# Altium PCB PCB_Ticketing_Master.PcbDoc
Units mm, origin at the board's own origin, x right, y up, seen from the top; angles counter-clockwise.
Board outline 125.09 x 85.09 mm, 2 copper layers (Top Layer, Bottom Layer); 58 components, 41 nets, 250 pads, 337 vias.
Unrouted connection lines stored in the file: 1.
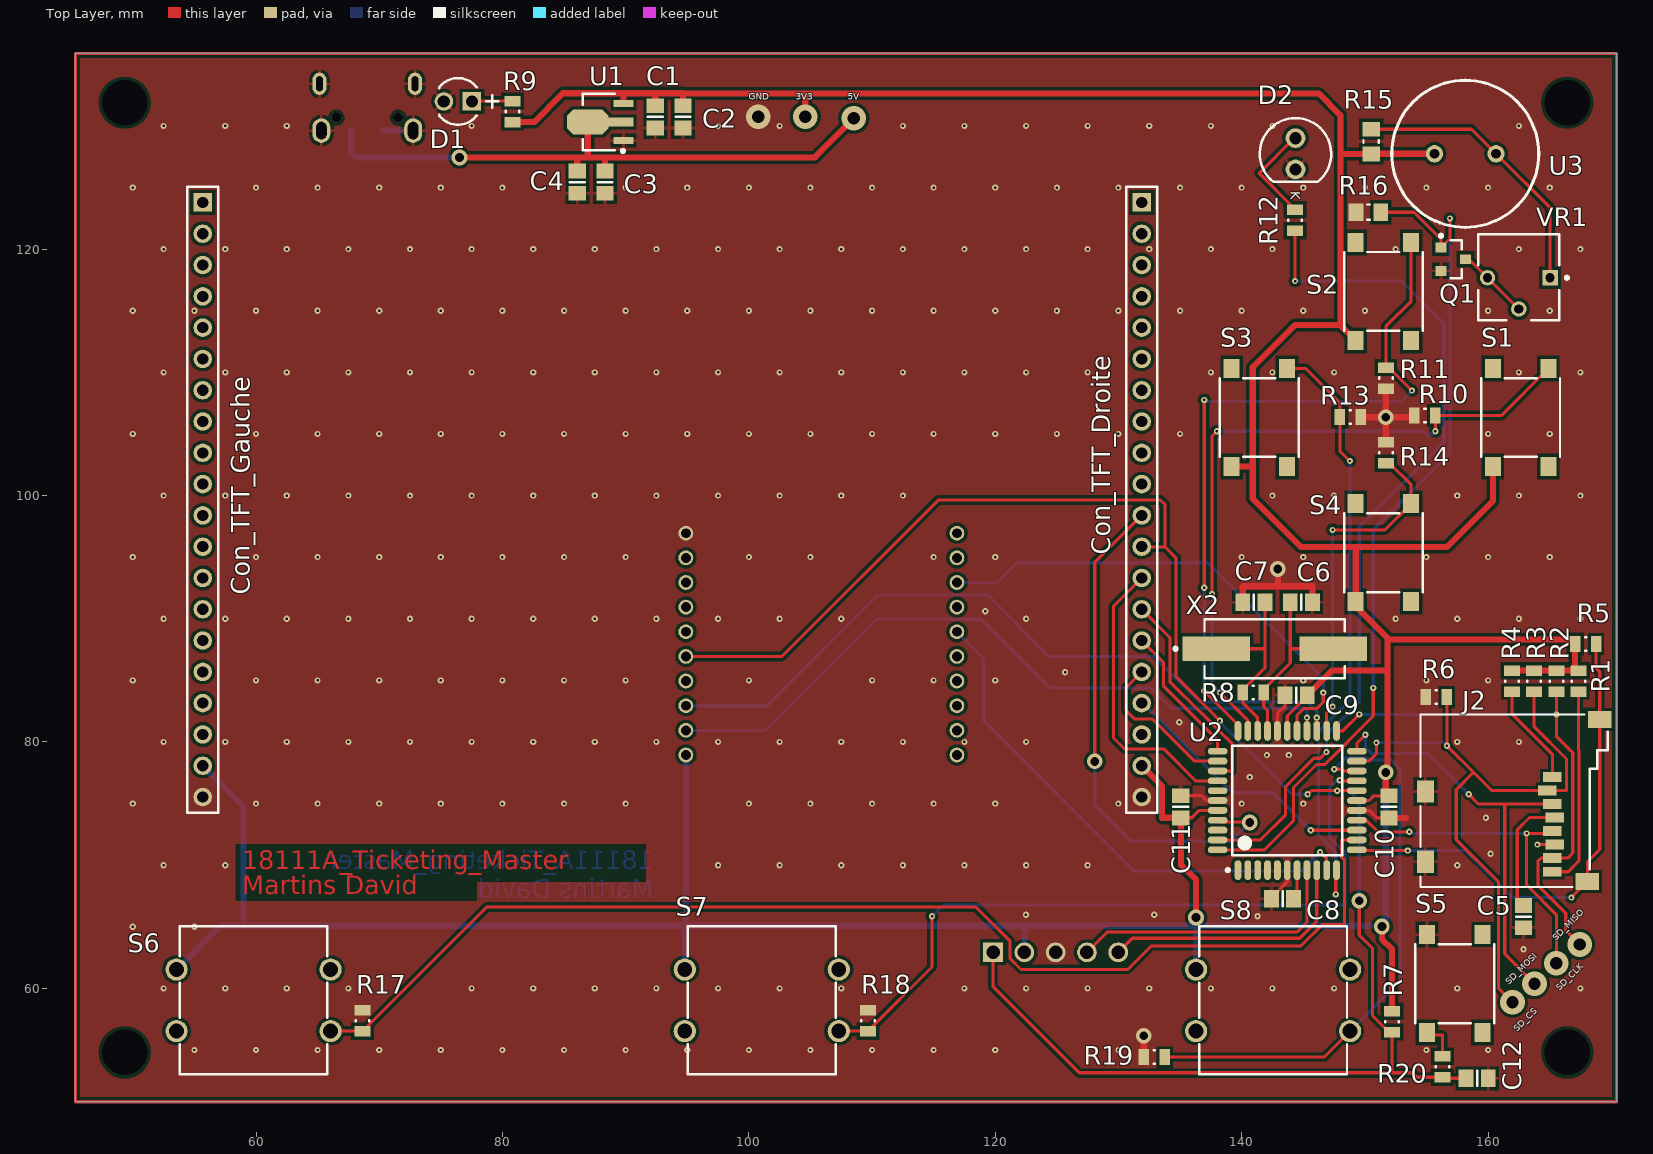
[diagram p0: Top Layer view]
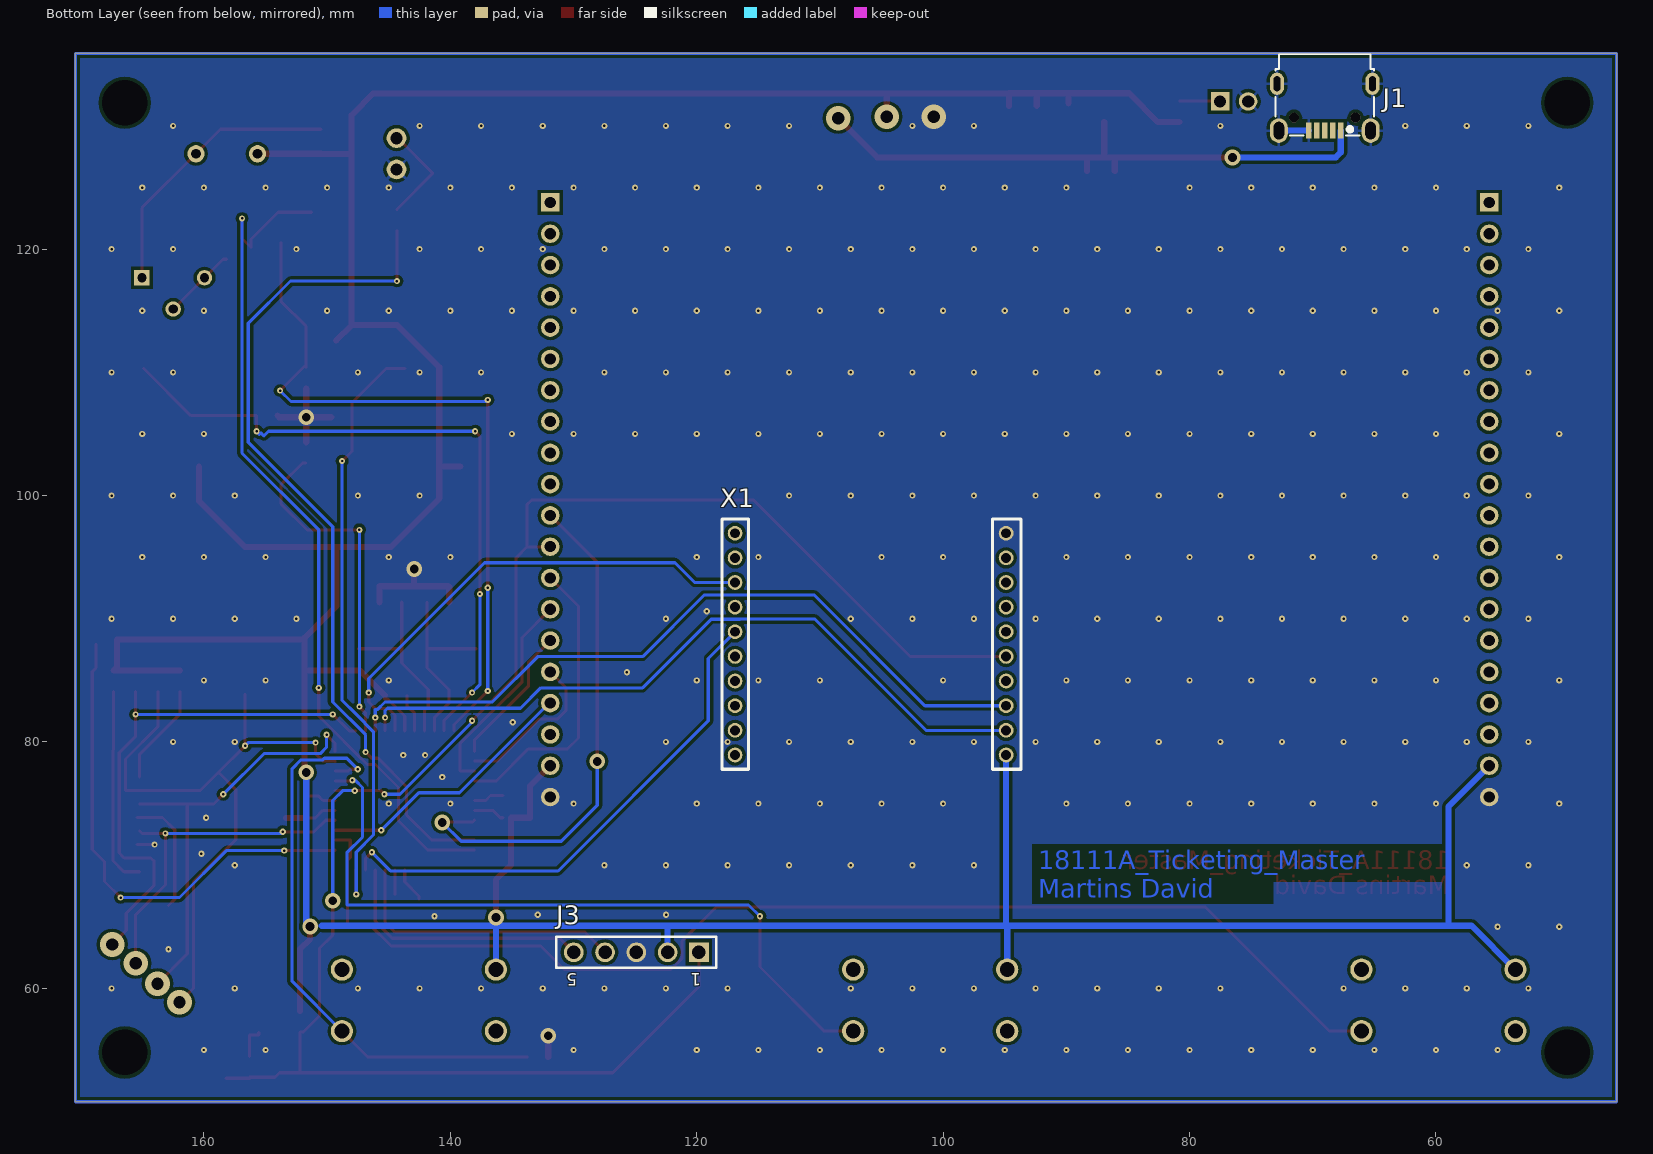
[diagram p1: Bottom Layer view, seen from below]
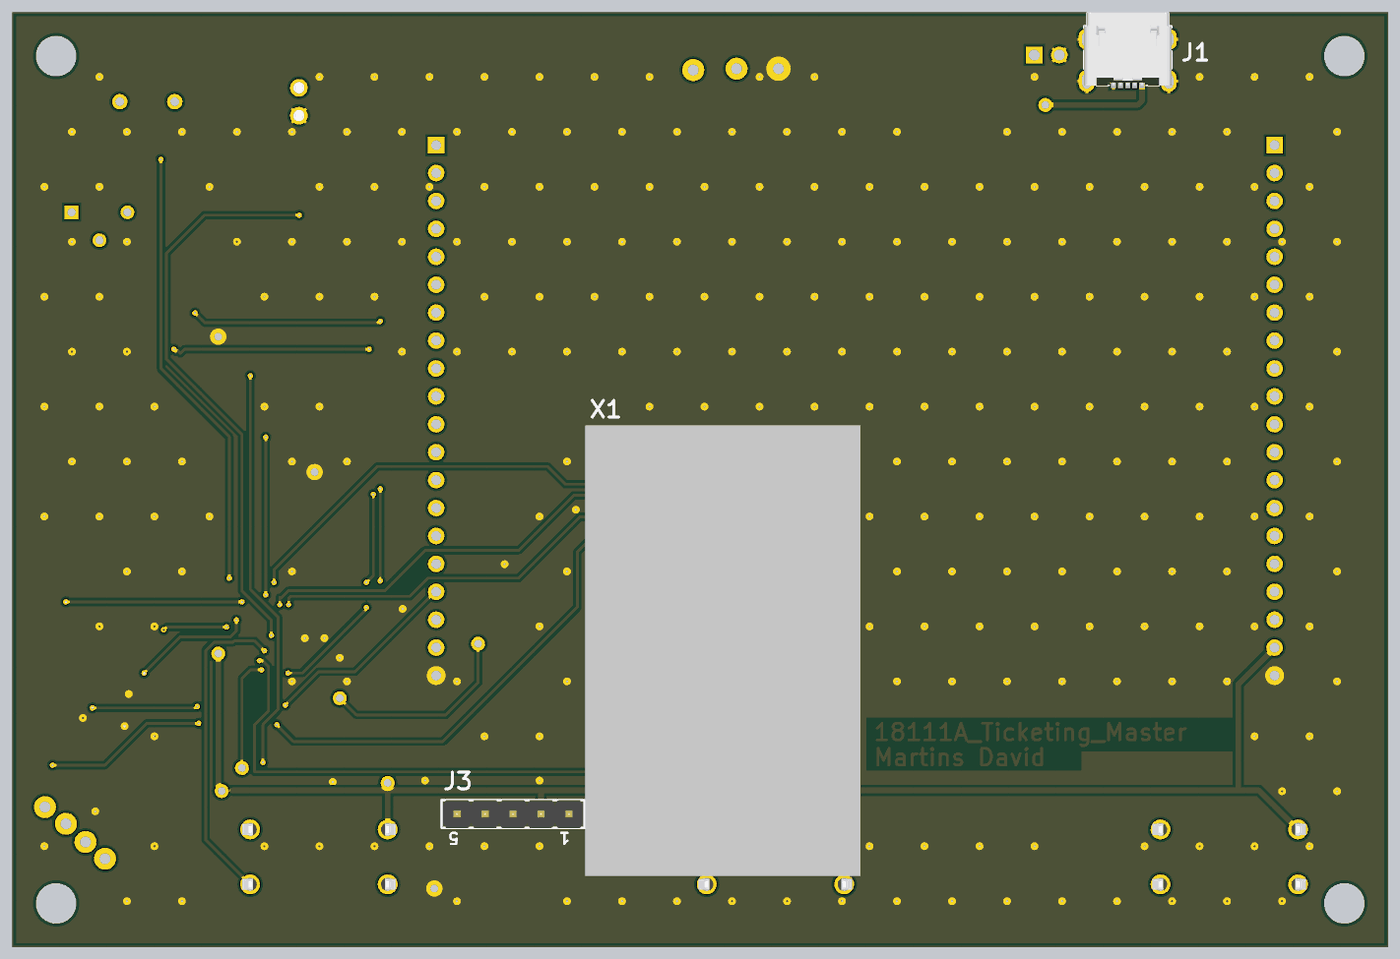
[diagram p2: 3D render of the assembled board from below, using the file's embedded part models]

## Layer stack, top to bottom
Top Solder: solder mask 0.0102, Solder Resist, Dk 3.5
Top Layer: signal copper 0.0356
Dielectric 1: dielectric 0.32, FR-4, Dk 4.8
Bottom Layer: signal copper 0.0356
Bottom Solder: solder mask 0.0102, Solder Resist, Dk 3.5

## Board outline
45.339,50.8 45.339,135.89 170.434,135.89 170.434,50.8

## Design rules (kind name [scope] priority, off if disabled: settings)
Clearance [All] p1: gap=0.254 ignorepadtopadclearanceinfootprint=FALSE except(0: Arc-Hole Track-Hole SMDPad-Hole THPad-Hole Via-Hole Fill-Hole Poly-Hole Region-Hole Text-Hole)
PolygonConnect PolygonConnect_4 [HasFootprint('430182050816')] p1: connectstyle=Relief reliefconductorwidth=0.254 reliefentries=4 polygonreliefangle="90 Angle" airgapwidth=0.254
PolygonConnect [HasFootprint('INTR-IRLML2402TRPBF-3_V')] p2: connectstyle=Relief reliefconductorwidth=0.254 reliefentries=4 polygonreliefangle="90 Angle" airgapwidth=0.254
PolygonConnect PolygonConnect_5 [HasFootprint('693071010811')] p3: connectstyle=Relief reliefconductorwidth=0.254 reliefentries=4 polygonreliefangle="90 Angle" airgapwidth=0.254
PolygonConnect PolygonConnect_7 [HasFootprint('6-0805_N')] p4: connectstyle=Relief reliefconductorwidth=0.254 reliefentries=4 polygonreliefangle="90 Angle" airgapwidth=0.254
PolygonConnect PolygonConnect_8 [HasFootprint('629105150521')] p5: connectstyle=Relief reliefconductorwidth=0.254 reliefentries=4 polygonreliefangle="90 Angle" airgapwidth=0.254
PolygonConnect PolygonConnect_6 [HasFootprint('SOT-89-MB3_M')] p6: connectstyle=Relief reliefconductorwidth=0.254 reliefentries=4 polygonreliefangle="90 Angle" airgapwidth=0.254
PolygonConnect PolygonConnect_2 [HasFootprint('LED-2P-2.28-3MM')] p7: connectstyle=Relief reliefconductorwidth=0.254 reliefentries=4 polygonreliefangle="45 Angle" airgapwidth=0.254
PolygonConnect PolygonConnect_3 [HasFootprint('Type 5mm')] p8: thpad.connectstyle=Relief thpad.reliefconductorwidth=0.254 thpad.reliefentries=4 thpad.polygonreliefangle="45 Angle" thpad.airgapwidth=0.254 smdpad.connectstyle=Relief smdpad.reliefconductorwidth=0.254 smdpad.reliefentries=4 smdpad.polygonreliefangle="90 Angle" smdpad.airgapwidth=0.254 via.connectstyle=Relief via.reliefconductorwidth=0.254 via.reliefentries=4 via.polygonreliefangle="90 Angle" via.airgapwidth=0.254
PolygonConnect PolygonConnect_1 [All] p9: connectstyle=Direct reliefconductorwidth=0.254 reliefentries=4 polygonreliefangle="90 Angle" airgapwidth=0.254
RoutingVias [All] p1: holewidth=0.711 width=1.27 viastyle="Through Hole" minholewidth=0.711 minwidth=1.27 maxholewidth=0.711 maxwidth=1.27
SolderMaskExpansion [All] p1: expansion=0.102 istentingtop=FALSE
Width [InNetClass('POWER')] p1: maxlimit=0.5 minlimit=0.254 preferedwidth=0.5
Width Width_1 [All] p2: maxlimit=0.254 minlimit=0.254 preferedwidth=0.254
30 further rules are at their usual default settings.

## Classes and differential pairs
component class Designator: D1 D2 Q1 R9 R10 R11 R12 R13 R14 R15 R16 R17 R18 R19 S1 S2 S3 S4 S5 S6 S7 S8 U3
net class POWER: 3V3 5V_USB GND

## Components (designator, comment, footprint, x,y, rotation, side; value= is the part's Value field where it differs from the comment)
C1 "100nF" 6-0805_N 92.407,130.735 r90 top
C2 "10uF" 6-0805_N 94.662,130.735 r90 top
C3 "10uF" 6-0805_N 88.328,125.44 r90 top
C4 "1uF" 6-0805_N 86.074,125.44 r90 top value=10uF
C5 "1uF" 6-0805_N 162.877,65.824 r90 top value=10uF
C6 "Cap" 6-0805_N 144.843,91.345 r180 top value=12pF
C7 "Cap" 6-0805_N 140.989,91.345 r180 top value=12pF
C8 "Cap" 6-0805_N 143.319,67.268 r0 top value=10uF
C9 "Cap" 6-0805_N 144.424,83.787 r0 top value=100nF
C10 "Cap" 6-0805_N 151.955,74.728 r90 top value=100nF
C11 "Cap" 6-0805_N 135.064,74.739 r270 top value=100nF
C12 "Cap" 6-0805_N 159.12,52.705 r180 top value=120nF
Con_TFT_Droite "HEADER-1X20ROUND" HDR1X20 131.889,123.79 r270 top
Con_TFT_Gauche "HEADER-1X20ROUND" HDR1X20 55.679,123.79 r270 top
D1 "LED_Rouge" LED-2P-2.28-3MM 76.389,131.99 r180 top locked
D2 "LED_Orange" "Type 5mm" 144.369,127.74 r270 top locked
J1 "629105150521" 629105150521 69.029,132.524 r0 bottom locked
J2 "Micro SD Card Connector, Push & Push" 693071010811 162.115,75.23 r90 top locked
J3 "2.54 mm_THT_Vertical_5 pin" 61300511121 124.904,62.928 r0 bottom
Q1 "IRLML2402TRPBF" INTR-IRLML2402TRPBF-3_V 157.178,119.184 r0 top
R1 "10k" RESC0805(2012)_L 167.348,84.938 r90 top
R2 "10k" RESC0805(2012)_L 165.544,84.938 r90 top
R3 "10k" RESC0805(2012)_L 163.74,84.938 r90 top
R4 "10k" RESC0805(2012)_L 161.935,84.938 r90 top
R5 "10k" RESC0805(2012)_L 167.918,87.947 r180 top
R6 "1M" RESC0805(2012)_L 155.804,83.661 r0 top
R7 "47k" RESC0805(2012)_L 152.209,57.301 r270 top
R8 "10M" RESC0805(2012)_L 140.945,84.012 r0 top value=47k
R9 "680" RESC0805(2012)_L 80.808,131.166 r270 top
R10 "10k" RESC0805(2012)_L 154.876,106.489 r180 top
R11 "10k" RESC0805(2012)_L 151.701,109.537 r270 top
R12 "680" RESC0805(2012)_L 144.335,122.353 r270 top
R13 "10k" RESC0805(2012)_L 148.819,106.362 r0 top
R14 "10k" RESC0805(2012)_L 151.701,103.48 r90 top
R15 "1k" RESC2013X60X35ML10T20 150.514,128.73 r270 top value=1kOhm
R16 "100k" RESC2013X60X35ML10T20 150.288,122.999 r0 top
R17 "10k" RESC0805(2012)_L 68.643,57.379 r90 top
R18 "10k" RESC0805(2012)_L 109.664,57.379 r90 top
R19 "10k" RESC0805(2012)_L 132.905,54.419 r180 top
R20 "120" RESC0805(2012)_L 156.291,53.633 r270 top value=10k
S1 "430152095826" 430152095826 162.639,106.34 r90 top locked
S2 "430152095826" 430152095826 151.509,116.57 r90 top locked
S3 "430152095826" 430152095826 141.439,106.34 r90 top locked
S4 "430152095826" 430152095826 151.509,95.37 r90 top locked
S5 "430182050816" 430182050816 157.289,60.388 r270 top
S6 "430466073726" 4304x60737x6_12x12x7.3 59.799,59.03 r0 top locked
S7 "430466073726" 4304x60737x6_12x12x7.3 101.049,59.03 r0 top locked
S8 "430466073726" 4304x60737x6_12x12x7.3 142.549,59.03 r0 top locked
U1 "MCP1700T-3302E/MB" SOT-89-MB3_M 87.828,130.319 r180 top
U2 "PIC32MX170F256D" MCHP-TQFP-PT44_N 143.7,75.247 r90 top
U3 "BuzzerPiezo" Buzzer 158.149,127.74 r0 top locked
VR1 "3362P-103LF-ND" BOUR-3362P 162.496,117.714 r180 top
X1 "Header ZB-SB" ZB-SB 105.889,87.945 r0 bottom value=2x10
X2 "LF XTAL003151" ECS-80-18-5PX-TR_V 142.684,87.566 r0 top
? "M3" 9774010151 49.339,54.8 r0 top locked
? "M3" 9774010151 49.339,131.89 r0 top
? "M3" 9774010151 166.434,131.89 r0 top
? "M3" 9774010151 166.434,54.8 r0 top

## Footprints (in the part's own frame and the unit in brackets; to place one, negate y for a bottom-side part, rotate by r counter-clockwise, add the part's x,y. Pads: shape width x height; smd on the part's side, far side on the other; paste and mask are expansions set on the pad)
6-0805_N [mm] "Chip Resistor, Body 2.0x1.2mm, IPC Medium Density"
  rect 1.2x1.4 smd: 1(-0.9,0) 2(0.9,0)
  silkscreen extent 0,-0.6 0,0.6, body extent -1.07,-0.7 1.07,0.7, height 0.7
4304x60737x6_12x12x7.3 [mm] "12x12mm washable Tact Switch, THT version"
  round 1.8 hole 1.2: 1(-6.25,2.5) 2(6.25,2.5) 3(-6.25,-2.5) 4(6.25,-2.5)
  silkscreen extent -6,-6 6,6, body extent -6.99,-6 6.99,6, height 7.35
9774010151 [mm] "M2.5 Thread Internal, Length 1mm"
  round 0 hole 3.7 unplated paste-403.566: 1(0,0)
61300511121 [mm] "Pin Header, pitch 2.54 mm, THT, Vertical, single row, 5p"
  rect 1.6x1.6 hole 1.1: 1(-5.08,0)
  round 1.6 hole 1.1: 2(-2.54,0) 3(0,0) 4(2.54,0) 5(5.08,0)
  silkscreen extent -6.5,-1.27 6.5,1.27, body extent -6.35,-1.27 6.35,1.27, height 8.57
430152095826 [mm] "SMD Tact Switch, body 6x6mm"
  rect 1.55x1.3 smd: 1(-3.975,2.25) 2(-3.975,-2.25) 3(3.975,2.25) 4(3.975,-2.25)
  silkscreen extent -3.2,-3.2 3.2,3.2, body extent -4.5,-3.1 4.5,3.1, height 9.53
430182050816 [mm] "SMD Tact Switch, body 6x6mm"
  rect 1.55x1.3 smd: 1(-3.975,2.25) 2(-3.975,-2.25) 3(3.975,2.25) 4(3.975,-2.25)
  silkscreen extent -3.2,-3.2 3.2,3.2, body extent -4.5,-3.1 4.5,3.1, height 5.03
629105150521 [mm] "Micro USB 2.0 SMT Type B Horizontal 5 Contacts High Current"
  rect 0.45x1.3 smd: 1(-1.3,2.9) 2(-0.65,2.9) 3(0,2.9) 4(0.65,2.9) 5(1.3,2.9)
  oval 1.15x1.8 hole 0.55 slot 1.2 at 90 deg: Shell(-3.875,-0.9) Shell(3.875,-0.9)
  oval 1.45x2 hole 0.85 slot 1.4 at 90 deg: Shell(-3.725,2.9) Shell(3.725,2.9)
  round 0.8 hole 0.8 unplated: ""(-2.5,1.85) ""(2.5,1.85)
  silkscreen extent -4,-3.3 4,3.3, body extent -4,-3.3 4,3.3, height 2.71
693071010811 [mm] "Micro SD Card Connector, Push & Push"
  rect 0.8x1.5 smd: 1(1.94,-3.1) 2(0.84,-2.7) 3(-0.26,-3.1) 4(-1.36,-3.3) 5(-2.46,-3.1) 6(-3.56,-3.3) 7(-4.66,-3.1) 8(-5.76,-3.1)
  rect 1.4x1.9 smd: 9(-6.55,-5.95) 9(6.6,-6.95)
  rect 1.8x1.4 smd: 10(-4.95,7.2) 10(0.75,7.2)
  silkscreen extent -7,-7.6 7,7.6, body extent -7,-7.61 7,7.6, height 1.85
BOUR-3362P [mm] "THD, 3-Leads, Body 6.6x6.99mm, Pitch 2.54mm"
  rect 1.25x1.25 hole 0.75: 1(-2.54,0.035)
  round 1.25 hole 0.75: 2(0,2.575) 3(2.54,0.035)
  silkscreen extent -4.03,-3.49 3.3,3.5, body extent -3.3,-3.49 3.3,3.49, height 4.95
Buzzer [mm] "Buzzer d_12mm"
  round 1.4 hole 0.8: 1(-2.5,0) 2(2.5,0)
  silkscreen extent -5.97,-5.97 5.97,5.97, body extent -5.97,-5.71 5.97,5.71, height 6.5
ECS-80-18-5PX-TR_V [mm] "SMD, 2-Leads, Body 11.4x4.8mm, Height 4.3mm"
  rect 5.5x2 smd: 1(-4.75,0) 2(4.75,0)
  silkscreen extent -8.17,-2.4 5.7,2.4, body extent -6.6,-2.4 6.6,2.4, height 4.3
HDR1X20 [mm] "Connector; Header; 20 Position"
  rect 1.5x1.5 hole 0.9: 1(0,0)
  round 1.5 hole 0.9: 2(2.54,0) 3(5.08,0) 4(7.62,0) 5(10.16,0) 6(12.7,0) 7(15.24,0) 8(17.78,0) 9(20.32,0) 10(22.86,0) 11(25.4,0) 12(27.94,0) 13(30.48,0) 14(33.02,0) 15(35.56,0) 16(38.1,0) 17(40.64,0) 18(43.18,0) 19(45.72,0) 20(48.26,0)
  silkscreen extent -1.27,-1.27 49.53,1.27
INTR-IRLML2402TRPBF-3_V [mm] "SOT23, 3-Leads, Body 3.05x1.4mm, Pitch 0.95mm"
  rect 0.9x0.8 smd: 1(-1,0.95) 2(-1,-0.95) 3(1,0)
  silkscreen extent -1.12,-1.55 0.7,2.02, body extent -0.7,-1.52 0.7,1.53, height 1.11
LED-2P-2.28-3MM [mm] "LED, 2-Leads, Dia 3mm, Pitch 2.28mm"
  rect 1.5x1.5 hole 1: 1(-1.14,0)
  round 1.5 hole 1: 2(1.14,0)
  silkscreen extent -3.29,-1.9 1.52,1.9, body extent -1.9,-1.91 1.52,1.91, height 5.3
MCHP-TQFP-PT44_N [mm] "QFN, 44-Leads, Body 10x10mm, Pitch 0.8mm, IPC Medium Density"
  oval 1.6x0.55 smd: 1(-5.65,4) 2(-5.65,3.2) 3(-5.65,2.4) 4(-5.65,1.6) 5(-5.65,0.8) 6(-5.65,0) 7(-5.65,-0.8) 8(-5.65,-1.6) 9(-5.65,-2.4) 10(-5.65,-3.2) 11(-5.65,-4) 23(5.65,-4) 24(5.65,-3.2) 25(5.65,-2.4) 26(5.65,-1.6) 27(5.65,-0.8) 28(5.65,0) 29(5.65,0.8) 30(5.65,1.6) 31(5.65,2.4) 32(5.65,3.2) 33(5.65,4)
  oval 0.55x1.6 smd: 12(-4,-5.65) 13(-3.2,-5.65) 14(-2.4,-5.65) 15(-1.6,-5.65) 16(-0.8,-5.65) 17(0,-5.65) 18(0.8,-5.65) 19(1.6,-5.65) 20(2.4,-5.65) 21(3.2,-5.65) 22(4,-5.65) 34(4,5.65) 35(3.2,5.65) 36(2.4,5.65) 37(1.6,5.65) 38(0.8,5.65) 39(0,5.65) 40(-0.8,5.65) 41(-1.6,5.65) 42(-2.4,5.65) 43(-3.2,5.65) 44(-4,5.65)
  silkscreen extent -5.77,-4.45 4.45,4.95, body extent -5,-5 5,5, height 1.2
RESC0805(2012)_L [mm] "Chip Resistor, Body 2.0x1.3mm, IPC High Density"
  rect 0.85x1.3 smd: 1(-0.85,0) 2(0.85,0)
  silkscreen extent -0.05,-0.55 0.05,0.55, body extent -1.1,-0.67 1.1,0.68, height 0.7
RESC2013X60X35ML10T20 [mm] "Chip Resistor, 2-Leads, Body 2.1x1.35mm, IPC Low Density"
  rect 1.2x1.45 smd: 1(-1,0) 2(1,0)
  silkscreen extent -0.1,-0.63 0.1,0.63, body extent -1.05,-0.68 1.05,0.67, height 0.6
SOT-89-MB3_M [mm] "SOT89, 3-Leads, Body 4.5x2.4 mm, Pitch 1.5mm, Lead Span 4.1mm, IPC Low Density"
  rect 1.6x0.6 smd: 1(-2,1.5) 3(-2,-1.5)
  rect 2x0.7 smd: 2(-1.8,0)
  oct 3.4x2 smd: 2(0.9,0)
  silkscreen extent -2.08,-2.3 1.3,2.47, body extent -1.3,-2.3 1.3,2.3, height 1.6
"Type 5mm" [mm] "THT, LED-5mm, 2pin- Body 5.8mm"
  round 1.6 hole 1: 1(1.27,0) 2(-1.27,0)
  silkscreen extent -2.9,-2.9 2.29,2.9, body extent -2.9,-2.9 2.5,2.9, height 11.7
ZB-SB [mm] "Header"
  round 1.2 hole 0.8: 1(-11,9) 2(-11,7) 3(-11,5) 4(-11,3) 5(-11,1) 6(-11,-1) 7(-11,-3) 8(-11,-5) 9(-11,-7) 10(-11,-9) 11(11,9) 12(11,7) 13(11,5) 14(11,3) 15(11,1) 16(11,-1) 17(11,-3) 18(11,-5) 19(11,-7) 20(11,-9)
  silkscreen extent -12.19,-10.16 12.06,10.16, body extent -12.55,-10.34 12.45,30.66, height 7.5

## Part data
C1: library part CMP-1036-04401-1, "CAP 100nF 16V ±10% 0805 (2012 Metric) Thickness 1.45mm SMD", Case-EIA=0805, Case-Metric=2012, Rated Voltage="16 V", Tolerance=Â±10%, Max Thickness="1.45 mm", Technology=SMT
C2 C3 C4 C5: library part CMP-1036-04930-1, "CAP 10uF 16V ±20% 0805 (2012 Metric) Thickness 1mm SMD", Case-EIA=0805, Case-Metric=2012, Rated Voltage="16 V", Tolerance=Â±20%, Max Thickness="1 mm", Technology=SMT
C6 C7 C8 C9 C10 C11 C12: "Capacitor", LatestRevisionDate=17-Jul-2002, LatestRevisionNote="Re-released for DXP Platform.", PackageDescription="Radial Cap, Thru-Hole; 2 Leads; 0.3 in Pin Spacing", PackageReference=RAD-0.3, Published=8-Jun-2000, Publisher="Altium Limited"
D1 D2: library part LED, "LED"
  D1: Supplier A Ref=754-1305-ND
  D2: Supplier A Ref=754-1271-ND
J1: "Micro USB 2.0 SMT Type B Horizontal 5 Contacts High Current WR-COM", ComponentLink1Description=Manufacturer, ComponentLink1URL=http://www.we-online.de, ComponentLink2Description=Datasheet, ComponentLink2URL=http://katalog.we-online.de/em/datasheet/629105150521.pdf, Construction=SMT, Gender=Receptacle, Interface Type="Type B", Part Number=629105150521, Published Date="April 2017", Publisher="Wurth Elektronik", Sub-Family="Micro USB 2.0", Type=Horizontal
J2: library part 693071010811, "WR-CRD Micro SD Card Connector, Push & Push, with card detection", Operating Temperature="-25 to 85 degC", Rated Current=0.5A, Working Voltage="500V AC", ComponentLink1Description=Manufacturer, ComponentLink1URL=http://www.we-online.de, ComponentLink2Description=Datasheet, ComponentLink2URL=http://katalog.we-online.de/em/datasheet/693071010811.pdf, Mounting Technology=SMT, Part Number=693071010811, Published Date="Feb. 2018", Publisher="Wurth Elektronik"
J3: library part 61300511121, "Pin Header WR-PHD, pitch 2.54 mm, THT, Vertical, single row, 5 pin", Contact Resistance="20 mOhm", Insulation Resistance=">1000 MOhm", Operating Temperature="-40 to 105 degC", Rated Current="3 A", Working Voltage="250 VAC", ComponentLink1Description=Manufacturer, ComponentLink1URL=http://www.we-online.de, ComponentLink2Description=Datasheet, ComponentLink2URL=http://katalog.we-online.de/em/datasheet/6130xx11121.pdf, Mounting Technology=THT, Orientation=Vertical, Part Number=61300511121, Pin Number=5, Pitch="2.54 mm", Published Date="Jan. 2018", Publisher="Wurth Elektronik", Row Number=Single
Q1: library part CMP-2000-05155-1, "HEXFET(R) Power MOSFET, N-Channel, 20 V, 1.2 A, 3-Pin SOT-23, RoHS, Tape and Reel", Manufacturer="Infineon Technologies", PackageCase=SOT-23, PartNumber=IRLML2402TRBF, Supplier=Digi-key, Supplier PN=IRLML2402PBFCT-ND
R1 R2 R3 R4 R5 R6 R7 R8 R9 R10 R11 R12 R13 R14 R17 R18 R19 R20: library part CMP-1013-00122-1, "100K 0.125W 5% 0805 (2012 Metric)  SMD", Case-EIA=0805, Case-Metric=2012, Power="0.125 W", Tolerance="5 %", Technology=SMT
R15: library part CMP-2100-03671-1, "Chip Resistor, 1 KOhm, +/- 1%, 125 mW, -55 to 155 degC, 0805 (2012 Metric), RoHS, Tape and Reel", PackageCase=0805, Voltage Rating=150V
R16: library part CMP-2100-03671-1, "Chip Resistor, 100 KOhm, +/- 1%, 125 mW, -55 to 155 degC, 0805 (2012 Metric), RoHS, Tape and Reel", PackageCase=0805, Voltage Rating=150V
S1 S2 S3 S4: "6x6mm SMD Tact Switch WS-TASV, height 9.5 mm, 260 gf", Operating Temperature="-40 to +85 degC", Rated Current="50 mA", Rated Voltage="12 VDC", ComponentLink1Description=Manufacturer, ComponentLink1URL=http://www.we-online.de, ComponentLink2Description=Datasheet, ComponentLink2URL=http://katalog.we-online.de/em/datasheet/4301x2xxx8x6.pdf, Life Cycle=200000, Operation Force="260 gf", Part Number=430152095826, Published Date="Nov. 2017", Publisher="Wurth Elektronik", Size="6x6x9.5 mm"
S5: "6x6mm SMD Tact Switch WS-TASV, height 5 mm, 160 gf", Operating Temperature="-40 to +85 degC", Rated Current="50 mA", Rated Voltage="12 VDC", ComponentLink1Description=Manufacturer, ComponentLink1URL=http://www.we-online.de, ComponentLink2Description=Datasheet, ComponentLink2URL=http://katalog.we-online.de/em/datasheet/4301x2xxx8x6.pdf, Life Cycle=1000000, Operation Force="160 gf", Part Number=430182050816, Published Date="Nov. 2017", Publisher="Wurth Elektronik", Size="6x6x5 mm"
S6 S7 S8: "WS-TATV 12x12mm washable Tact Switch, THT version", ComponentLink1Description=Manufacturer, ComponentLink1URL=http://www.we-online.de, ComponentLink2Description=Datasheet, ComponentLink2URL=http://katalog.we-online.de/em/datasheet/4304x60737x6.pdf, Life Cycle="300000 cycles", Operation Force=260g, Part Number=430466073726, Published Date="June 2017", Publisher="Wurth Elektronik", Size="12x12x7.3 mm"
U1: library part CMP-0136-00812-1, "Low Quiescent Current LDO, 3-Pin SOT-89, Extended Temperature, Tape and Reel", Code_IPC=SOT89, DatasheetVersion="revB, Feb-2007", PackageDescription="3-Lead Plastic Small Outline Transistor Header (MB) [SOT-89]", PackageReference=SOT-89-MB3, PackageVersion="revBB, Aug-2009"
U2: library part MCHP-PIC32MX2XXFXXXD-TQFP-44
U3: library part BZR, "Buzzer 12mm piezo", Manufacturer="TDK Corporation"
VR1: library part CMP-1747-00003-1, "Square Trimpot(R) Trimming Potentiometer, 100 KOhm, 300 V, -55 to 125 degC, 3-Pin THD, RoHS, Tube", Case\Package=Axial, Max Operating Temperature="155 degC", Min Operating Temperature="-55 degC", Package Quantity=200, Power Rating="250 mW", Resistance="1 mohm", Tolerance=1%, Voltage Rating="250 V", ComponentLink1Description="Manufacturer URL", ComponentLink1URL=http://www.bourns.com/, ComponentLink2Description=Datasheet, ComponentLink2URL=http://www.bourns.com/docs/Product-Datasheets/3362.pdf, DatasheetVersion=May-16, Length="0.248 inch", Mount="Through Hole", PackageDescription="3-Pin Through Hole Device, Body 6.6 x 6.99 mm, Pitch 2.54 mm", PackageReference=3326P, Packaging=Bulk, RoHSCompliant=true
X1: library part "HDR ZB-SB 2x10", "Header 2x10", PackageCase=XBee
X2: library part CMP-2000-06193-1, "Low Profile Quartz Crystal, 8.0 MHz, 2-Pin SMD, RoHS, Tape and Reel", Case Height=4.3mm, Case Length=13.2mm, Case Width=4.8mm, Frequency=8MHz, Frequency Stability=50PPM, Load Capacitance=18pF, Manufacturer=ECS, Operating Temperature Range=-10Cto+70C, Package / Case=HC-49/US, Package Description="2-Pin Surface Mount Device, Body 11.4 x 4.8 mm, Height 4.3 mm", Package Reference=ECS-80-18-5PX-TR, Tolerance=30PPM, Brand=ECS, Datasheet URL=https://www.ecsxtal.com/store/pdf/csm-7x.pdf, Datasheet Version=05/2016, Dimensions=4.8mmWx13.2mmLx4.3mmH, Factory Pack Quantity=1000, Manufacturer URL=https://www.ecsxtal.com/, Mounting Style=SMD/SMT, Mounting Technology=SurfaceMount, Packaging=Reel, Product Category=Crystals, RoHS=Details, Series=CSM-7X, Termination Style=SMD/SMT, Type=SMDQuartzCrystals
? ? ? ?: library part 9774010151, "WA-SMSI SMT Steel Spacer, M2.5 Thread Internal, Length 1mm", ComponentLink1Description=Manufacturer, ComponentLink1URL=http://www.we-online.de, ComponentLink2Description=Datasheet, ComponentLink2URL=http://katalog.we-online.de/em/datasheet/9774010151.pdf, InnerDiameter=3.5mm, Length=1mm, OuterDiameter=5.1mm, Packaging=Bulk, PartNumber=9774010151, PublishedDate="Dec. 2016", Publisher="Wurth Elektronik", Thread=M2.5

## Via types
v1: diameter 0.5, hole 0.2, Top Layer to Bottom Layer, 320 vias
v2: diameter 1.27, hole 0.711, Top Layer to Bottom Layer, 10 vias
v3: diameter 2, hole 1, Top Layer to Bottom Layer, 7 vias

## Nets (pads, with @x,y where several pads share a name; then routed paths per layer and width w, separated by ;. In a path a pad name is that pad's centre, name@x,y a point inside that pad or via, vN(x,y) a via of type N, cw(c..) or ccw(c..) an arc to the next point about the centre after c; other vN are vias at no path point)
3V3: C1.2 C2.2 C9.2 C10.2 C11.2 Con_TFT_Droite.19 Con_TFT_Gauche.19 J3.2 R1.2 R2.2 R3.2 R4.2 R5.2 R7.1 R9.2 R15.2 S1.1 S2.1 S3.1 S4.1 S6.1 S7.1 S8.1 U1.3 U2.17 U2.28 U2.40 U3.1 X1.1 | length 379.1
  Top Layer w0.254: C11.2@135.721,73.85 135.953,73.85 136.55,74.447 U2.40 ; U2.28 143.7,82.105 145.097,83.502 145.324,83.502 C9.2 ; U2.17 150.344,75.247 150.725,75.628 C10.2@151.679,75.628
  Top Layer w0.5: R9.2 82.564,130.316 84.899,132.651 89.828,132.651 ; U1.3 89.828,132.651 ; C1.2 92.407,132.636 92.392,132.651 ; C2.2 94.662,132.635 ; v3(104.584,130.746) 104.584,132.635 ; Con_TFT_Droite.19 133.54,76.419 133.54,73.85 135.053,73.85 C11.2 135.064,70.04 136.299,68.805 v2(136.299,65.757) ; S3.1 140.906,102.365 ; C9.2 147.326,85.788 151.193,85.788 ; 149.259,95.821 S4.1 149.259,91.024 151.824,88.459 151.824,85.643 ; S2.1 148.018,113.836 ; 151.32,85.788 151.679,85.788 151.824,85.643 ; v2(151.384,65.024) 151.384,64.007 152.209,63.182 R7.1 ; C10.2@151.679,75.628 151.701,75.65 v2(151.701,77.533) 151.842,77.533 151.824,77.551 151.824,85.643 ; 151.828,88.328 167.068,88.328 167.068,86.068 R1.2 R2.2 R3.2 R4.2 ; U3.1 150.524,127.74 R15.2 148.05,127.73 148.018,127.698 ; S1.1 160.389,99.556 156.654,95.821 144.833,95.821 140.906,99.748 140.906,102.365 ; 89.828,132.651 92.392,132.651 ; 92.392,132.651 94.678,132.651 94.662,132.635 ; 94.662,132.635 104.584,132.635 ; 104.584,132.635 146.256,132.635 148.018,130.873 148.018,127.698 ; 140.906,102.365 140.906,110.426 144.316,113.836 148.018,113.836 ; 148.018,113.836 148.018,127.698
  Bottom Layer w0.5: S6.1 57.106,65.087 58.991,65.087 ; Con_TFT_Gauche.19 58.991,74.758 58.991,65.087 ; S7.1 94.799,65.087 ; X1.1 94.889,65.177 94.799,65.087 ; J3.2 122.364,64.96 122.237,65.087 ; S8.1 136.299,65.087 ; v2(136.299,65.757) 136.299,65.087 ; 150.431,65.087 136.299,65.087 ; v2@151.023,65.087 151.447,65.087 151.701,65.341 v2(151.701,77.533) ; 58.991,65.087 94.799,65.087 ; 94.799,65.087 122.237,65.087 ; 122.237,65.087 136.299,65.087
5V_USB: C3.2 C4.2 J1.1 U1.2 | length 49.2
  Top Layer w0.5: v2(76.517,127.444) 86.042,127.444 ; C4.2 86.074,127.412 86.042,127.444 ; U1.2@86.928,130.319 86.928,127.568 86.804,127.444 ; C3.2 88.328,127.444 ; v3(108.521,130.619) 105.346,127.444 88.328,127.444 ; 86.042,127.444 86.804,127.444 ; 86.804,127.444 88.328,127.444
  Bottom Layer w0.5: J1.1 67.729,127.85 68.135,127.444 v2(76.517,127.444)
BackLight: Con_TFT_Droite.11 U2.41 | length 42.2
  Top Layer w0.254: v2(128.079,78.422) 128.079,94.58 Con_TFT_Droite.11 ; U2.41 138.194,73.503 140.618,73.503 v2(140.652,73.469)
  Bottom Layer w0.254: v2(128.079,78.422) 128.079,74.866 131,71.945 139.128,71.945 v2(140.652,73.469)
Connect(M): U2.27 X1.18 | length 40
  Top Layer w0.254: U2.27 144.5,82.187 145.019,82.706 146.082,82.706 146.621,83.245 v1(146.621,84.01)
  Bottom Layer w0.254: X1.18 120.16,92.945 121.766,94.551 137.223,94.551 146.621,85.153 v1(146.621,84.01)
CS: Con_TFT_Droite.14 U2.36 | length 17.4
  Top Layer w0.254: Con_TFT_Droite.14 134.175,88.484 134.175,84.881 136.697,82.359 136.715,82.359 137.608,81.466 137.608,81.463 137.978,81.093 137.981,81.093 139.231,79.843 139.231,77.647 U2.36
D/C: Con_TFT_Droite.13 U2.37 | length 23.8
  Top Layer w0.254: Con_TFT_Droite.13 129.603,91.024 129.603,80.327 130.492,79.438 133.667,79.438 136.258,76.847 U2.37
GND: C1.1 C2.1 C3.1 C4.1 C5.1 C6.1 C7.2 C8.1 C9.1 C10.1 C11.1 C12.1 Con_TFT_Droite.20 Con_TFT_Gauche.20 D1.2 D2.1 J1.5 J1.Shell J2.6 J2.10 J3.3 Q1.2 R6.1 R10.2 R11.2 R13.2 R14.2 R16.1 R17.2 R18.2 R19.2 S5.2 U1.1 U2.6 U2.16 U2.29 U2.39 X1.10 | length 36.7
  Top Layer w0.254: C11.1@135.721,75.65 136.735,75.65 137.138,75.247 U2.39 ; C8.1@142.557,67.268 142.557,67.5 143.7,68.643 U2.6 ; U2.29 142.9,82.321 143.524,82.945 C9.1 ; D2.1@144.335,126.436 D2.1 ; U2.16 150.342,74.447 150.961,73.828 C10.1 ; v1(163.999,71.67) J2.6
  Top Layer w0.5: R19.2 v2(132.055,56.158) ; C7.2 140.089,92.569 140.155,92.635 142.938,92.635 ; v2(142.938,94.043) 142.938,92.635 ; C6.1 145.743,92.635 142.938,92.635 ; R13.2 v2(151.701,106.362) ; R14.2 v2(151.701,106.362) ; R11.2 v2(151.701,106.362) ; C10.1 153.33,73.828 ; R10.2 153.899,106.362 v2(151.701,106.362)
  Bottom Layer w0.5: J1.5 J1.Shell@72.754,129.624
  other v1: 55,55 60,55 65,55 70,55 75,55 80,55 85,55 90,55 95,55 100,55 105,55 110,55 115,55 120,55 130,55 155,55 160,55 52.5,60 57.5,60 62.5,60 67.5,60 77.5,60 82.5,60 87.5,60 92.5,60 97.5,60 102.5,60 107.5,60 117.5,60 122.5,60 127.5,60 132.5,60 137.5,60 142.5,60 147.5,60 157.5,60 167.5,60 162.877,63.182 50,65 55,65 141.287,65.849 122.491,65.976 132.905,65.976 52.5,70 57.5,70 97.5,70 102.5,70 107.5,70 112.5,70 117.5,70 122.5,70 127.5,70 157.5,70 160.21,70.929 159.829,73.85 50,75 60,75 65,75 70,75 75,75 80,75 85,75 90,75 100,75 105,75 110,75 115,75 120,75 130,75 140,75 145,75 140.652,77.152 142.049,78.93 143.827,78.93 52.5,80 57.5,80 62.5,80 67.5,80 72.5,80 77.5,80 82.5,80 87.5,80 92.5,80 97.5,80 102.5,80 107.5,80 112.5,80 117.5,80 122.5,80 157.5,80 162.5,80 134.937,81.597 50,85 60,85 65,85 70,85 75,85 80,85 85,85 90,85 100,85 110,85 115,85 120,85 145,85 155,85 160,85 125.666,85.661 52.5,90 57.5,90 62.5,90 67.5,90 72.5,90 77.5,90 82.5,90 87.5,90 92.5,90 97.5,90 102.5,90 107.5,90 122.5,90 152.5,90 157.5,90 162.5,90 167.5,90 119.189,90.614 50,95 60,95 65,95 70,95 75,95 80,95 85,95 90,95 100,95 105,95 115,95 120,95 140,95 145,95 155,95 160,95 165,95 52.5,100 57.5,100 62.5,100 67.5,100 72.5,100 77.5,100 82.5,100 87.5,100 92.5,100 97.5,100 102.5,100 107.5,100 112.5,100 142.5,100 147.5,100 157.5,100 162.5,100 167.5,100 50,105 60,105 65,105 70,105 75,105 80,105 85,105 90,105 95,105 100,105 105,105 110,105 115,105 120,105 125,105 130,105 135,105 160,105 165,105 52.5,110 57.5,110 62.5,110 67.5,110 72.5,110 77.5,110 82.5,110 87.5,110 92.5,110 97.5,110 102.5,110 107.5,110 112.5,110 117.5,110 122.5,110 127.5,110 137.5,110 142.5,110 147.5,110 162.5,110 167.5,110 50,115 55,115 60,115 65,115 70,115 75,115 80,115 85,115 90,115 95,115 100,115 105,115 110,115 115,115 120,115 125,115 130,115 135,115 140,115 145,115 150,115 160,115 165,115 52.5,120 57.5,120 62.5,120 67.5,120 72.5,120 77.5,120 82.5,120 87.5,120 92.5,120 97.5,120 102.5,120 107.5,120 112.5,120 117.5,120 122.5,120 127.5,120 132.5,120 137.5,120 142.5,120 152.5,120 162.5,120 167.5,120 50,125 60,125 65,125 70,125 75,125 80,125 90,125 95,125 100,125 105,125 110,125 115,125 120,125 125,125 130,125 135,125 140,125 145,125 150,125 155,125 160,125 165,125 52.5,130 57.5,130 62.5,130 77.5,130 97.5,130 102.5,130 112.5,130 117.5,130 122.5,130 127.5,130 132.5,130 137.5,130 142.5,130 162.5,130
  other v3: 100.774,130.746
LED_Ques: R12.2 U2.43 | length 69.4
  Top Layer w0.254: U2.43 141.516,72.047 143.573,74.104 143.573,76.386 145.863,78.676 146.367,78.676 v1(146.875,79.184) ; v1(144.335,117.411) R12.2
  Bottom Layer w0.254: v1(144.335,117.411) 152.971,117.411 156.4,113.982 156.4,104.33 149.542,97.472 149.542,83.248 146.875,80.581 v1(146.875,79.184)
LINK(M): U2.10 X1.16 | length 42.8
  Top Layer w0.254: v1(146.367,71.056) 146.9,70.523 U2.10
  Bottom Layer w0.254: X1.16 119.062,86.772 119.062,81.724 131.254,69.532 144.868,69.532 144.868,69.557 v1(146.367,71.056)
MISO: Con_TFT_Droite.16 U2.35 | length 12.7
  Top Layer w0.254: Con_TFT_Droite.16@131.833,85.634 130.619,84.42 130.619,82.543 131.311,81.851 132.778,81.851 136.182,78.447 U2.35
MOSI: Con_TFT_Droite.15 U2.34 | length 11.5
  Top Layer w0.254: Con_TFT_Droite.15 133.667,86.452 133.667,84.522 138.05,80.139 U2.34
NetC5_2: C5.2 J2.4 | length 9.8
  Top Layer w0.254: C5.2 162.369,67.232 162.369,72.874 163.365,73.87 J2.4
NetC6_2: C6.2 R8.2 U2.30 X2.2 | length 15
  Top Layer w0.254: U2.30 142.1,82.562 141.795,82.867 R8.2 141.795,84.264 143.943,86.412 143.943,87.566 ; C6.2 143.943,87.566 ; X2.2 143.943,87.566
NetC7_1: C7.1 R8.1 U2.31 X2.1 | length 15.6
  Top Layer w0.254: X2.1 141.889,87.566 ; U2.31 141.3,81.965 140.095,83.17 R8.1 140.095,84.215 141.889,86.009 141.889,87.566 ; C7.1 141.889,87.566
NetC8_2: C8.2 U2.7 | length 2
  Top Layer w0.254: C8.2@144.5,67.611 U2.7
NetD1_1: D1.1 R9.1 | length 3.3
  Top Layer w0.254: D1.1 77.555,132.016 R9.1
NetD2_2: D2.2 R12.1 | length 8.3
  Top Layer w0.254: R12.1 144.335,123.253 141.414,126.174 144.25,129.01 D2.2
NetJ2_1: J2.1 R4.1 | length 8.3
  Top Layer w0.254: R4.1 161.935,82.285 165.215,79.005 J2.1
NetJ2_2: J2.2 R3.1 R6.2 U2.21 | length 54.2
  Top Layer w0.254: U2.21@149.375,78.422 U2.21 150.329,78.447 150.939,79.057 v1(150.939,79.946) ; R6.2@156.654,83.886 R6.2 v1(156.654,79.692) 158.813,77.533 ; v3(161.988,58.864) 160.845,60.007 160.845,68.643 157.416,72.072 157.416,76.136 158.813,77.533 ; R3.1 163.74,81.242 166.367,78.615 166.367,76.07 J2.2 160.276,76.07 158.813,77.533
  Bottom Layer w0.254: v1(150.939,79.946) 156.4,79.946 v1(156.654,79.692)
NetJ2_3: J2.3 U2.22 | length 35.3
  Top Layer w0.254: U2.22 149.35,79.881 v1(150.05,80.581) ; v1(158.432,75.755) 159.217,74.97 161.226,74.97 ; v3(163.766,60.388) 161.353,62.801 161.353,74.843 161.226,74.97 ; J2.3 161.226,74.97
  Bottom Layer w0.254: v1(150.05,80.581) 150.05,79.565 150.558,79.057 155.13,79.057 v1(158.432,75.755)
NetJ2_5: J2.5 U2.15 | length 27.9
  Top Layer w0.254: U2.15 150.126,73.647 151.066,72.707 v1(153.606,72.707) ; J2.5 165.025,72.58 v1(163.131,72.58) 163.131,68.389 165.544,65.976 v3(165.544,62.039)
  Bottom Layer w0.254: v1(153.606,72.707) 153.733,72.58 v1(163.131,72.58)
NetJ2_7: J2.7 R2.1 U2.23 | length 43.3
  Top Layer w0.254: U2.23 148.207,80.897 v1(149.542,82.232) ; R2.1 v1(165.544,82.232) 165.544,80.454 166.875,79.123 166.875,70.99 166.455,70.57 J2.7 164.296,70.57 164.042,70.316 164.042,68.367 166.306,66.103 166.306,64.706 v3(167.449,63.563)
  Bottom Layer w0.254: v1(149.542,82.232) v1(165.544,82.232)
NetJ2_8: J2.8 R1.1 | length 16.3
  Top Layer w0.254: J2.8 166.498,69.47 167.383,70.355 167.383,79.333 167.348,79.368 R1.1
NetJ2_9: J2.9 R5.1 U2.12 | length 40.7
  Top Layer w0.254: U2.12 149.414,71.183 v1(153.479,71.183) ; v1(166.758,67.373) 168.065,68.68 168.065,70.275 169.065,71.275 169.065,81.83 169.065,85.696 168.768,85.993 R5.1
  Bottom Layer w0.254: v1(153.479,71.183) 158.177,71.183 161.987,67.373 v1(166.758,67.373)
NetQ1_1: Q1.1 R16.2 U2.44 | length 70.8
  Top Layer w0.254: U2.44 141.859,71.247 144.208,73.596 144.208,76.303 146.073,78.168 146.751,78.168 147.506,78.923 147.506,78.929 149.789,81.212 149.792,81.212 150.685,82.105 v1(150.685,84.391) ; R16.2 153.987,122.999 156.178,120.808 Q1.1 156.908,120.864 v1(156.908,122.491)
  Bottom Layer w0.254: v1(150.685,84.391) 150.685,97.218 156.908,103.441 v1(156.908,122.491)
NetQ1_3: Q1.3 VR1.2 VR1.3 | length 6
  Top Layer w0.254: Q1.3 158.451,119.184 VR1.3 VR1.2
NetR10_1: R10.1 S1.4 U2.32 | length 55.9
  Top Layer w0.254: v1(137.604,92.011) 137.604,104.838 v1(137.985,105.219) ; v1(138.239,84.01) 140.5,81.749 U2.32 ; v1(155.726,105.219) R10.1 161.063,106.489 S1.4
  Bottom Layer w0.254: v1(137.604,92.011) 137.604,84.645 v1(138.239,84.01) ; v1(137.985,105.219) 154.757,105.219 155.138,104.838 155.392,105.092 155.515,104.969 155.726,105.18 v1(155.726,105.219)
NetR11_1: R11.1 S2.4 U2.33 | length 59.3
  Top Layer w0.254: v1(136.969,84.137) 139.7,81.406 U2.33 ; v1(136.969,92.519) v1(136.969,107.759) ; R11.1 151.701,113.728 153.759,115.786 S2.4 ; R11.1@151.718,110.624 v1(153.821,108.521)
  Bottom Layer w0.254: v1(136.969,84.137) v1(136.969,92.519) ; v1(136.969,107.759) 137.096,107.632 152.932,107.632 v1(153.821,108.521)
NetR13_1: R13.1 S3.4 U2.11 | length 49.3
  Top Layer w0.254: S3.4 145.208,110.315 147.969,107.554 R13.1 147.969,103.617 v1(148.78,102.806) ; v1(147.637,67.627) 147.637,69.534 U2.11
  Bottom Layer w0.254: v1(147.637,67.627) 147.637,71.056 146.244,72.449 146.244,80.843 147.637,82.236 147.644,82.236 148.78,83.372 v1(148.78,102.806)
NetR14_1: R14.1 S4.4 U2.24 | length 28.1
  Top Layer w0.254: U2.24 146.9,82.384 v1(147.383,82.867) ; v1(147.383,97.218) 151.632,97.218 S4.4 153.759,100.875 152.004,102.63 R14.1
  Bottom Layer w0.254: v1(147.383,82.867) v1(147.383,97.218)
NetR15_1: R15.1 U3.2 VR1.1 | length 22.8
  Top Layer w0.254: R15.1 158.659,129.73 U3.2 165.036,123.353 VR1.1
NetR17_1: R17.1 S6.4 U2.13 | length 99.1
  Top Layer w0.254: S6.4 S6.4 R17.1 78.725,66.611 118.427,66.611 121.183,63.855 121.183,62.439 122.091,61.531 130.746,61.531 132.651,63.436 144.799,63.436 146.534,65.171 148.356,65.171 148.356,70.394 148.12,70.63 148.12,72.047 U2.13
NetR18_1: R18.1 S7.4 U2.19 | length 60.3
  Top Layer w0.254: S7.4 S7.4 R18.1 114.871,61.736 v1(114.871,65.849) ; v1(147.954,76.898) 148.005,76.847 U2.19
  Bottom Layer w0.254: v1(114.871,65.849) 115.795,66.773 148.399,66.773 148.399,71.012 147.133,72.278 147.133,76.308 147.723,76.898 v1(147.954,76.898)
NetR19_1: R19.1 S8.4 U2.20 | length 47.3
  Top Layer w0.254: R19.1 146.688,54.419 S8.4 ; v1(147.51,77.787) 148.145,77.787 148.285,77.647 U2.20
  Bottom Layer w0.254: v1(147.51,77.787) 148.399,78.676 150.221,78.676 150.348,78.549 152.122,78.549 152.844,77.827 152.844,60.575 S8.4 S8.4@149.24,56.53
NetR20_1: R20.1 S5.4 | length 2.7
  Top Layer w0.254: S5.4@155.547,56.413 155.547,56.215 156.291,56.215 R20.1
PGEC2: J3.5 U2.9 | length 21.3
  Top Layer w0.254: J3.5 131.127,64.071 144.716,64.071 146.1,65.455 U2.9
PGED2: J3.4 U2.8 | length 23.1
  Top Layer w0.254: J3.4 129.095,64.579 144.506,64.579 145.3,65.373 U2.8
RESET: C12.2 Con_TFT_Droite.12 J3.1 R7.2 R20.2 U2.18 X1.5 | length 149.5
  Top Layer w0.254: X1.5 102.693,86.945 115.379,99.631 133.413,99.631 133.787,99.257 133.787,95.821 ; J3.1 119.824,60.134 126.809,53.149 152.146,53.149 ; Con_TFT_Droite.12 131.918,95.821 133.787,95.821 ; v1(138.239,81.724) 134.683,85.28 134.683,94.925 133.787,95.821 ; v1(145.351,75.755) 145.643,76.047 148.145,76.047 ; v1(147.764,76.047) 148.145,76.047 ; U2.18 148.145,76.047 ; v2(149.542,67.119) 149.542,64.326 150.622,63.246 150.622,57.785 151.956,56.451 R7.2 152.209,53.212 152.146,53.149 ; R20.2@156.259,52.705 C12.2 ; R20.2 154.227,52.783 153.861,53.149 152.146,53.149
  Bottom Layer w0.254: v1(138.239,81.724) 138.239,81.597 144.081,75.755 v1(145.351,75.755) ; v1(147.764,76.047) 148.742,76.047 149.542,75.247 v2(149.542,67.119)
SCLK: Con_TFT_Droite.17 U2.14 | length 21.8
  Top Layer w0.254: v1(145.605,72.834) 149.337,72.834 U2.14
  Bottom Layer w0.254: Con_TFT_Droite.17@131.889,83.248 139.255,75.882 142.557,75.882 v1(145.605,72.834)
UART_RX: U2.26 X1.2 | length 58.9
  Top Layer w0.254: U2.26 v1(145.3,81.978)
  Bottom Layer w0.254: X1.2 101.392,80.945 110.426,89.979 116.468,89.979 116.483,89.964 118.823,89.964 124.396,84.391 132.651,84.391 134.302,82.74 145.097,82.74 145.3,82.537 v1(145.3,81.978)
UART_TX: U2.25 X1.3 | length 60.5
  Top Layer w0.254: U2.25 v1(146.1,81.978)
  Bottom Layer w0.254: X1.3 101.487,82.945 110.468,91.926 119.401,91.926 124.396,86.931 132.905,86.931 136.588,83.248 145.307,83.248 145.929,82.626 146.1,82.626 v1(146.1,81.978)
pads on no net: ?.1 Con_TFT_Droite.1 Con_TFT_Droite.2 Con_TFT_Droite.3 Con_TFT_Droite.4 Con_TFT_Droite.5 Con_TFT_Droite.6 Con_TFT_Droite.7 Con_TFT_Droite.8 Con_TFT_Droite.9 Con_TFT_Droite.10 Con_TFT_Droite.18 Con_TFT_Gauche.1 Con_TFT_Gauche.2 Con_TFT_Gauche.3 Con_TFT_Gauche.4 Con_TFT_Gauche.5 Con_TFT_Gauche.6 Con_TFT_Gauche.7 Con_TFT_Gauche.8 Con_TFT_Gauche.9 Con_TFT_Gauche.10 Con_TFT_Gauche.11 Con_TFT_Gauche.12 Con_TFT_Gauche.13 Con_TFT_Gauche.14 Con_TFT_Gauche.15 Con_TFT_Gauche.16 Con_TFT_Gauche.17 Con_TFT_Gauche.18 J1. J1.2 J1.3 J1.4 S1.2 S1.3 S2.2 S2.3 S3.2 S3.3 S4.2 S4.3 S5.1 S5.3 S6.2 S6.3 S7.2 S7.3 S8.2 S8.3 U2.1 U2.2 U2.3 U2.4 U2.5 U2.38 U2.42 X1.4 X1.6 X1.7 X1.8 X1.9 X1.11 X1.12 X1.13 X1.14 X1.15 X1.17 X1.19 X1.20

## Polygon pours and split planes (outlines as drawn)
GND on Top Layer "Top Layer-No Net" (solid, remove dead copper, pour order 0): 45.402,135.826 45.402,50.863 170.37,50.863 170.37,135.826
GND on Bottom Layer "Top Layer-No Net" (solid, remove dead copper, pour order 2): 170.37,135.826 45.402,135.826 45.402,50.863 170.37,50.863

## Other copper
Top Layer:
  text "18111A_Ticketing_Master" at 58.864,69.659 h1.52
  text "Martins David" at 58.864,67.627 h1.52
Bottom Layer:
  text "18111A_Ticketing_Master" at 92.265,69.659 h1.52
  text "Martins David" at 92.265,67.373 h1.52
Multi-Layer:
  the board outline again, w0.254

## Silkscreen, mask and mechanical layers (free items; w line width, h text height)
Top Overlay:
  text "GND" at 100.012,132.143 h0.52
  text "3V3" at 103.822,132.143 h0.52
  text "5V" at 108.013,132.143 h0.52
  text "SD_MISO" at 165.544,63.817 h0.52 r45
  text "SD_MOSI" at 161.734,60.261 h0.52 r45
  text "SD_CLK" at 165.798,59.753 h0.52 r45
  text "SD_CS" at 162.369,56.451 h0.52 r45

## Text inside footprints (layer, text, board x,y; h text height)
D2: Top Overlay "K" at 143.988,124.692 h0.76 r270; Mechanical 15 "K" at 143.988,124.692 h0.76 r270
J1: Mechanical 15 "PCB Edge" at 67.129,134.924 h1 r180
J3: Bottom Overlay "5" at 129.704,61.228 h1 r180; Bottom Overlay "1" at 119.634,61.228 h1 r180